# Altium PCB REO_ECG.PcbDoc (part 2 of 2)
Units mm, origin at the board's own origin, x right, y up, seen from the top; angles counter-clockwise.
Board outline 105 x 125 mm, 2 copper layers (Top Layer, Bottom Layer); 206 components, 124 nets, 654 pads, 46 vias.
Unrouted connection lines stored in the file: 133.
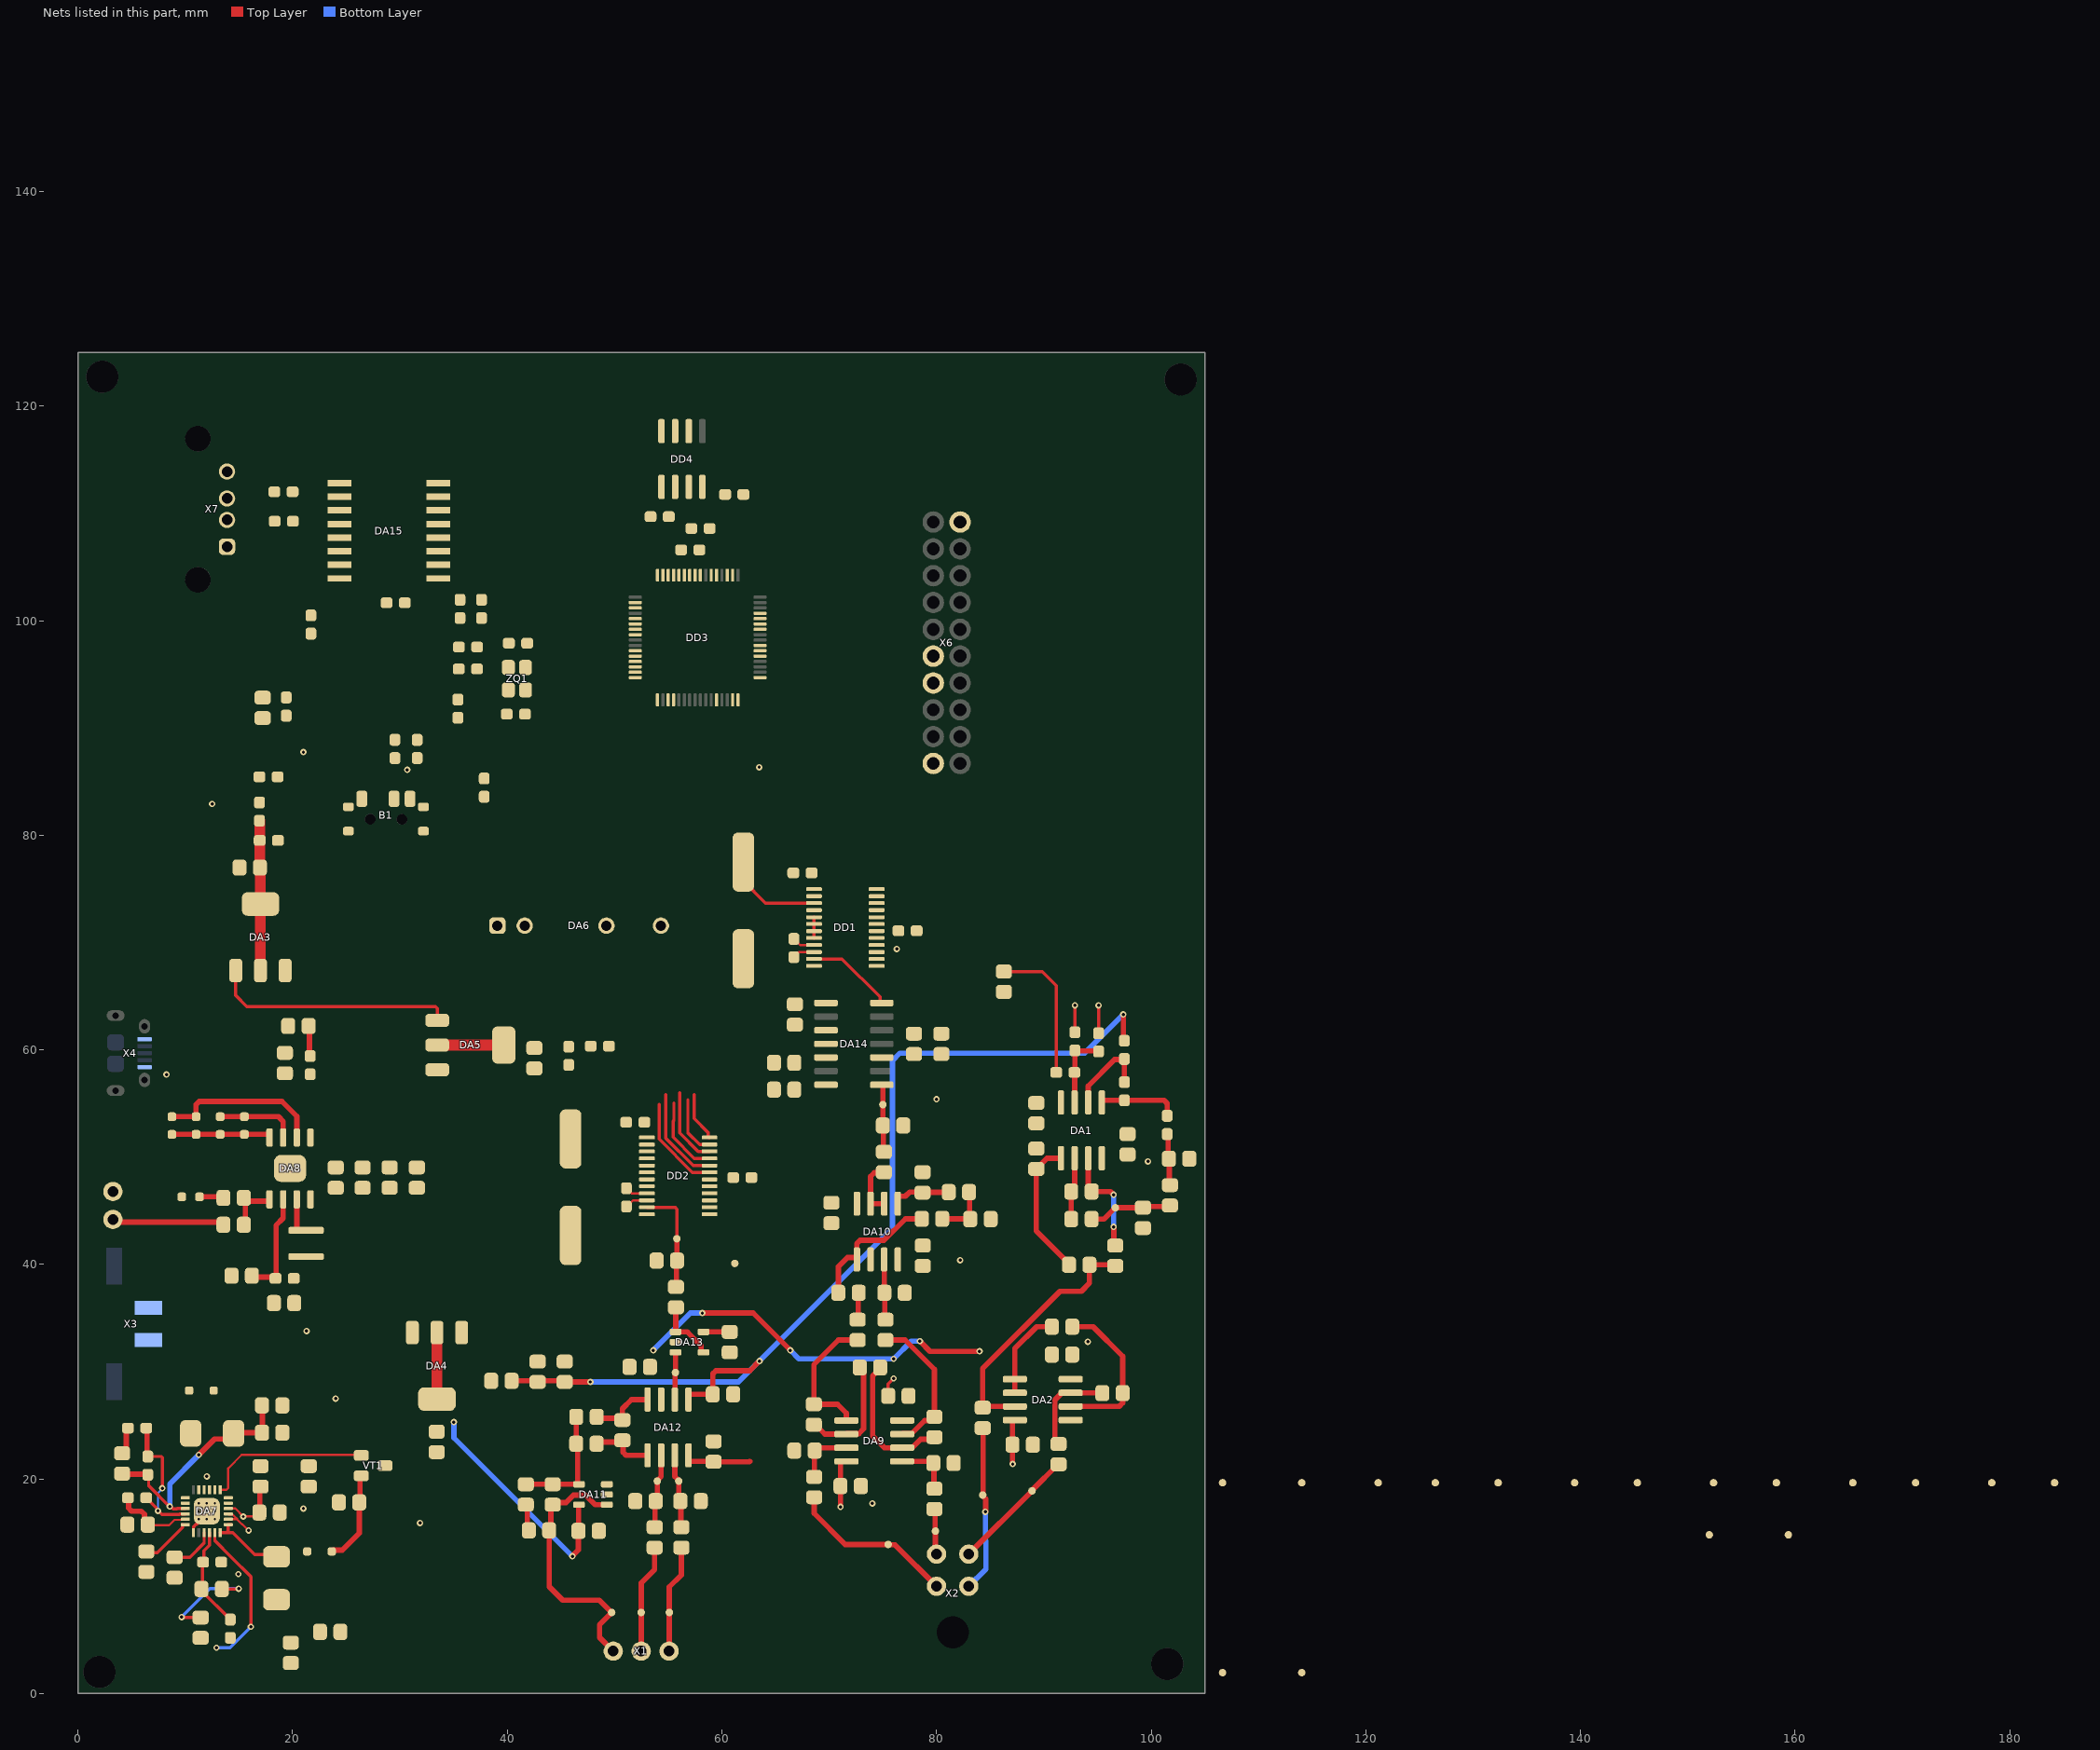
[diagram p2: the nets of this part, all layers, seen from the top]

## Part data
B1: library part "Slide switch SPDT", Code=-, Name=-
BQ1 BQ2: library part "SMD 4.9152MHz 2pin 10.3x4.5 16pF_1", Code=6321974907, Name="Резонатор кварцевый HC49SM 7.3728 MHz", Parameter 1="7.3728 MHz"
C17 C18 C22: library part "22u 35V 0805 ±20%", Code=6279375691, Name="Конденсатор X5R 35V 22uF±20% 0805"
C23: library part "6.8p 50V 0805 ±5%", Code=6219233221, Name="Конденсатор COG 16V 6.8pF±5% 0805"
C53 C54 C55 C56 C57 C63 C64 C65 C67 C69 C70 C71 C72 C73 C74: "CC0603KRX7R9BB104", Code=6279259871, Name="Конденсатор X7R 50V 0,1uF +-10% 0603"
DA1 DA2 DA9 DA10: library part AD8028_part
DA3 DA4 DA5: library part "LDO: 15-3.3V AMS1117", Code=6339112951, Name="Микросхема AMS-1117-3.3"
DA6: library part "DC-DC: 5-5V AM1D-0505SZ", Name="Микросхема AM1D-0505SZ, AIMTEC"
DA7: library part "DC-DC: 3-15/-15V TPS65130RGET", Code=6339113561, Name="Микросхема TPS65130RGET, TI"
DA14: library part LF398MX
DA15: library part "USB ADuM4160", Name="Микросхема ADuM4160"
DD3: library part "STM32F103 lqfp64 64kb", Code=6335530806, Name="Микросхема STM32F103RBT6"
DD4: library part "128Kb I2C 1MHz", Code=6339110311, Name="Микросхема M24M01-RMN6TP, ST"
L1 L2: "LPS5030", Code=6339119781, Name="Микросхема LPS5030-472MR(B), Coilcraft"
L3: "LPS3015", Code=6319247691, Name="Дроссель LPS3015-222MRC, Coilcraft"
L4 L5: library part "600Ohm 0,8A", Code=6310011671, Name="Дроссель BLM18HE601SN1D, Murata"
R18 R33: library part "100 ±1%  0805", Code=6094351171, Name="Резистор 100R±1%  0805"
R58 R59 R60: library part "1k ±1%", Code=6069174188, Name="Резистор 1k ±1% 0603"
VD1 VD5: library part "Rectifier 1A 40V", Code=6349982351, Name="Диод VS-10BQ040-M35BT, Vishay"
VD2 VD3 VD4 VD6: library part "LED green 0603", Code=6340003921, Name="Светодиод KPT-1608SGC, Kingbright"
VD7: library part "LED red 0603", Code=6349551609, Name="Светодиод KP-1608SURCK"
VT1: library part "MOS N Si2302CDS-T1-E3", Code=6349982201, Name="Транзистор Si2302CDS-T1-E3,  Vishay"
X1: library part "3 pin WF-3", Code=6313932013, Name="Вилка WF-3"
X2: library part "4 pin MicroFit DR R Molex"
X3: library part "2 pin MicroFit SR Molex", Code=6319211711, Name="Вилка Micro-Fit 3.0 43650-0225, Molex"
X4: library part "5 pin USB Micro SMD", Code=6319209171, Name="Розетка 10118194-0001LF, Amphenol"
X5: library part "2 pin WF-2", Code=6313952902, Name="Вилка WF-2"
X6: library part "20 pin IDC BH20 2.54", Code=6313922720, Name="Вилка BH-20 Импорт"
X7: library part "4 pin USB"
ZQ1: library part "SMD 8MHz 4pin 3.2x2.5 22pF", Code=6329545441, Name="Резонатор кварцевый KT-7X 8.0 MHz"
C1 C2 C3 C4 C5 C9 C10 C11 C12 C15 C33 C34 C35 C36 C39 C43 C44 C45 C46 C47 C51 C52: Code=6279254871, Name="Конденсатор X7R 50V 0,1uF ±10% 0805"
C6 C31 C32 C37 C38 C42: Code=6279352311, Name="Конденсатор NPO 50V 6800pF ±5% 0805"
C7 C8 C24 C25 C26 C27 C28 C29 C30: Code=6279375691, Name="Конденсатор X5R 35V 22uF±20% 0805"
C13 C14 C68: Code=6270000501, Name="Конденсатор X7R 25V 4,7uF±10% 0805"
C16 C19 C49 C50: Code=6289735441, Name="Конденсатор 12065D106KAT2A, AVX"
C20: Code=6279238291, Name="Конденсатор NP0 50V 12pF±5% 0603"
C21 C40 C41: Name="Конденсатор 0805B224K500NT, Fenghua"
C48: Code=6279261451, Name="Конденсатор X7R 50V  0,01uF±5%  0805"
C58 C59: Code=6270003321, Name="Конденсатор СС0603KRX7R0BB104, Yageo"
C60: Code=62193105441, Name="Конденсатор 0603-NPO-25В-1000"
C61 C62: Code=6219310401, Name="Конденсатор 0603CG220J500NT, Fenghua"
C66: Code=6270001221, Name="Конденсатор X7R 50V 0,22uF±10% 0603"
DA11: Name="Микросхема OPA189IDBVR"
DA13: Code=6339115821, Name="Микросхема TLV9101IDBVR"
R1 R26 R27: Code=6094342239, Name="Резистор 0R ±1% 0805"
R2 R3: Code=6069180761, Name="Резистор 680R ±1% 0603"
R4 R5 R56: Code=6069174188, Name="Резистор 1k ±1% 0603"
R6: Code=6094357331, Name="Резистор 3К ±1% 0603"
R7: Code=6069180621, Name="Резистор 200R±1% 0603"
R8 R12 R15 R16 R17 R34: Code=6027158691, Name="Резистор RC0805FR-071KL, Yageo"
R9 R10 R11 R13 R14: Code=6094352561, Name="Резистор 2k±1%  0805"
R19: Code=6069180891, Name="Резистор 2,2k ±1% 0603"
R20: Code=6060001691, Name="Резистор 121K±1% 0603"
R21 R23: Code=6069194591, Name="Резистор 1,2M±1% ТК50 0603"
R22 R29 R45: Code=6020003061, Name="Резистор RC0805JR-0710KL"
R24: Code=6027155891, Name="Резистор CRCW0603133KFKEA, Vishay"
R25 R49: Code=6094354057, Name="Резистор 51K±1% 0805"
R28: Code=6094357581, Name="20R ±1% 0805"
R30: Name="Резистор 0.5 ±1% 0603"
R31 R32 R41 R42 R43: Code=6094357331, Name="Резистор 3К ±1% 0805"
R35: Code=6019041741, Name="Резистор RC0805FR-07820KL, Yageo"
R36 R37 R38 R39: Code=6069137191, Name="Резистор 510R±1%  0805"
R40: Code=6094357025, Name="Резистор 300R±1%  0805"
R44: Name="Резистор RC0805FR-071KL, Yageo"
R46 R47: Code=6094357031, Name="Резистор 510K±1% 0805"
R48 R50: Code=6094357581, Name="Резистор 20K±1% 0805"
R51: Name="Резистор 75К±1% 0805"
R54 R55: Code=6069180381, Name="Резистор 27R±1% 0603"
R57: Code=6069191961, Name="Резистор 10K+-1% TK50 0603"

## Free pads (board coordinates)
  round 3 hole 3: ""(2,2) ""(2.25,122.75) ""(101.5,2.75) ""(102.75,122.5)

## Via types
v1: diameter 0.6, hole 0.3, Top Layer to Bottom Layer, 46 vias

## Nets (pads, with @x,y where several pads share a name; then routed paths per layer and width w, separated by ;. In a path a pad name is that pad's centre, name@x,y a point inside that pad or via, vN(x,y) a via of type N, cw(c..) or ccw(c..) an arc to the next point about the centre after c; other vN are vias at no path point)
1D_N: DD3.44
1D_P: DD3.45
1GAIN0: DD2.19 DD3.25 | length 9.2
  Top Layer w0.3: 54.149,54.9 54.149,51.694 57.259,48.584 DD2.19@58.849,48.584
1GAIN1: DD2.20 DD3.24 | length 9.2
  Top Layer w0.3: 54.784,55.809 54.784,51.766 57.331,49.219 DD2.20@58.849,49.219
2D_N: DA15.6
2D_P: DA15.7
3D_N: DA15.11 R54.1
3D_P: DA15.10 R55.1
4D_N: R54.2 X7.2
4D_P: R55.2 X7.3
+1.65: C9.1 C44.2 DA12.5 R4.1 R16.1 R17.2 TP22.1 | length 92.3
  Top Layer w0.5: R16.1@40.4,29.15 C9.1@45.35,29.15 ; C9.1@45.35,29.05 v1(47.75,29.05) ; DA12.5@56.883,27.409 56.883,27.85 56.933,27.9 C44.2@59.15,27.9 59.15,29.807 59.443,30.1 62.6,30.1 v1(63.5,31) ; v1(97.4,63.3) 97.419,63.281 97.419,60.931 R4.1@97.5,60.85
  Bottom Layer w0.5: v1(47.75,29.05) 61.55,29.05 v1(63.5,31) 75.9,43.4 75.9,59 76.6,59.7 93.8,59.7 v1(97.4,63.3)
+3.3: C11.1 C39.1 C46.1 C58.2 C59.1 C60.2 DA4.2 DA4.4 DA11.5 DA13.5 DD3.1 DD3.13 R16.2 TP14.1 | length 31.1
  Top Layer w0.1: C58.2@35.6,100.2 C58.2@35.6,100.25
  Top Layer w0.3: C59.1@35.18,92.87 C59.1@35.4,92.65
  Top Layer w0.5: v1(46.067,12.797) 46.067,12.824 46.628,13.385 C39.1@46.628,15.164 46.653,15.189 46.653,17.584 DA11.5@46.678,17.609 ; DA13.5@58.278,33.709 C46.1@60.728,33.709
  Top Layer w1: DA4.4@33.45,27.45 DA4.2@33.45,33.65
  Bottom Layer w0.5: v1@35.044,25.254 35.025,25.254 35.025,23.839 v1(46.067,12.797)
  other v1: 35.025,25.3
+3.3ADC: C12.1 C64.2 DA5.2 DA5.4 L4.1 TP19.1 | length 6.2
  Top Layer w1: DA5.2@33.475,60.45 DA5.4@39.675,60.45
+3.3M: C10.1 C69.2 DA3.2 DA3.4 L5.1 TP16.1 X6.1 | length 14.1
  Top Layer w1: C69.2@16.925,79.525 L5.1@16.925,81.341 ; C10.1@16.95,77 C69.2@16.95,79.25 ; DA3.4@16.975,73.125 C10.1@16.975,77 ; DA3.2@17,67.4 DA3.4@17,73.6
+3.3MCU: B1.3 C66.1 C67.1 C68.1 C70.2 C71.2 C72.2 C73.2 C74.2 DD3.19 DD3.32 DD3.48 DD3.64 DD4.8 L5.2 R58.2 R59.2 R60.2 TP31.1 | length 0.2
  Top Layer w0.3: C72.2@31.45,89.05 C72.2@31.6,88.9
+3ADC: C63.1 C65.2 DD1.1 DD2.1 L4.2 TP30.1
+5: C13.1 C27.1 C28.1 C29.1 C30.1 DA3.3 DA4.3 DA5.3 DA6.1 DA7.5 DA7.6 DA8.8 R18.1 TP7.1 VT1.3
"+5 USB": DA15.1 DD3.43
+5ADC: C55.1 C56.1 DA6.7 DD1.16 DD1.18 DD2.16 DD2.18 TP9.1 | length 0.3
  Top Layer w0.2: DD1.18@74.421,71.07 DD1.18@74.436,71.085 ; v1@76.2,69.4 v1(76.3,69.4) v1@76.3,69.508 ; C55.1@76.435,71.085 C55.1@76.45,71.1
+5C: C19.1 DA8.1 R19.2 TP8.1 X4.1
  other v1: 8.25,57.7
+12: C1.2 C2.2 C33.2 C35.2 C45.1 C50.1 C52.1 DA1.8 DA2.8 DA9.8 DA10.8 DA12.7 DA14.12 R27.2 TP12.1 | length 34.7
  Top Layer w0.5: v1(58.175,35.475) 62.899,35.475 v1(66.379,31.995) ; v1(78.45,32.85) 79.4,31.9 v1(84,31.9)
  Bottom Layer w0.5: v1(53.6,32) 57.075,35.475 v1(58.175,35.475) ; v1(66.379,31.995) 67.174,31.2 v1(76,31.2) ; v1@76.019,31.219 77.65,32.85 v1(78.45,32.85)
  other v1: 94.1,32.8 99.7,49.6
+P: C26.1 L3.2 R30.2 X3.1
  other v1: 21.3,33.8
-12: C3.2 C4.2 C34.1 C36.1 C43.1 C49.1 C51.1 DA1.4 DA2.4 DA9.4 DA10.4 DA12.4 DA14.3 R26.2 TP10.1 | length 15.3
  Top Layer w0.5: DA12.4@56.883,22.209 56.883,21.7 56.933,21.65 59.186,21.65 C43.1@59.228,21.609 62.531,21.609 62.573,21.65 62.6,21.65 ; v1(71.05,17.4) 71.05,21.595 71.1,21.645 DA9.4@71.6,21.645 ; v1(87.1,21.4) 87.088,21.412 87.088,23.188 C4.2@87.077,23.2 87.077,25.445 87.127,25.495 DA2.4@87.3,25.495
  other v1: 24,27.5 82.2,40.4 80,55.4
DRDY: DD1.24 DD3.22
DRDY1: DD2.24 DD3.35 | length 4.7
  Top Layer w0.3: 57.4,55.825 57.4,53.6 58.713,52.287 58.713,51.863 58.741,51.835 DD2.24@58.849,51.835
GAIN0: DD1.19 DD3.51
GAIN1: DD1.20 DD3.52
GND: BQ1.1 BQ2.1 C10.2 C12.2 C63.2 C64.1 C65.1 C66.2 C67.2 C68.2 C69.1 C70.1 C71.1 C72.1 C73.1 C74.1 DA3.1 DA5.1 DA15.2 DA15.3 DA15.4 DA15.5 DA15.8 DA15.9 DA15.12 DA15.13 DA15.14 DA15.15 DD1.2 DD1.4 DD2.2 DD2.4 DD2.5 DD2.6 DD2.7 DD2.8 DD3.18 DD3.31 DD3.47 DD3.63 DD4.2 DD4.3 DD4.4 R1.2 R5.1 R57.2 TP2.1 X6.20 X7.4 | length 36.4
  Top Layer w0.3: DA3.1@14.7,67.4 14.7,65.075 15.725,64.05 33.299,64.05 33.475,63.874 DA5.1@33.475,62.75 ; C71.1@19.4,91.15 C71.1@19.5,91.05 ; R1.2@86.278,67.306 89.844,67.306 91.15,66 R5.1@91.15,57.9
  Top Layer w0.5: R57.2@29.483,87.156 R57.2@29.527,87.2
  other v1: 12.5,82.925 30.675,86.1 63.475,86.35 21,87.75
GNDA: C1.1 C2.1 C3.1 C4.1 C6.2 C9.2 C11.2 C13.2 C14.2 C15.2 C16.2 C17.2 C18.2 C19.2 C21.2 C22.2 C24.2 C25.2 C26.2 C27.2 C28.2 C29.2 C30.2 C33.1 C34.2 C35.1 C36.2 C37.2 C39.2 C43.2 C44.1 C45.2 C46.2 C47.2 C48.2 C49.2 C50.2 C51.2 C52.2 C55.2 C56.2 C57.1 C58.1 C59.2 C60.1 C61.2 C62.2 DA2.5 DA4.1 DA6.2 DA6.5 DA7.0 DA7.2 DA7.3 DA7.19 DA8.0 DA11.2 DA11.3 DA13.2 DA14.10 DD1.12 DD1.13 DD1.14 DD1.15 DD1.17 DD2.12 DD2.13 DD2.14 DD2.15 DD2.17 DD3.12 L2.2 R1.1 R8.1 R10.2 R17.1 R24.1 R31.2 R32.2 R38.1 R41.2 R43.1 R46.1 R47.1 TP1.1 VD7.1 X3.2 X4.5 X5.1 ZQ1.2 ZQ1.4 | length 6.7
  Top Layer w0.2: DA7.2@14,16.25 14.801,16.25 ; DA7.3@14,16.75 14.05,16.7 14.401,16.7 14.8,16.301 14.8,16.251 15.26,15.791 15.309,15.791 v1@15.898,15.202
  Top Layer w0.3: DA7.19@10.75,15 10.75,15.526 10.999,15.775 11.054,15.775 11.231,15.952 11.231,16.231 DA7.0@11.25,16.25 ; C33.1@75.491,27.744 75.491,28.866 v1(76,29.375)
  other v1: 14.94,11.14 15.9,15.2 31.875,15.9 21,17.25 74.025,17.725
INGEN: C31.2 TP11.1 X2.3 | length 4.1
  Top Layer w0.5: C31.2@79.8,17.2 79.862,17.138 TP11.1@79.862,15.188 ; X2.3@79.9,13.1 TP11.1@79.9,15.15
LOGIC: DA14.11 DD3.11
"MEM SCL": DD3.29 DD4.6 R59.1
"MEM SDA": DD3.30 DD4.5 R60.1
"MEM WP": DD3.28 DD4.7 R58.1
NetB1_1: B1.1 R57.1 | length 0.1
  Top Layer w0.3: R57.1@29.45,88.977 R57.1@29.527,88.9
NetB1_2: B1.2 DD3.60 | length 0.1
  Top Layer w0.5: B1.2@29.439,83.399 B1.2@29.483,83.443
NetBQ1_2: BQ1.2 DD2.3
NetBQ2_2: BQ2.2 DD1.3 | length 9.2
  Top Layer w0.3: BQ2.2@62,77.5 62,75.75 64.064,73.686 DD1.3@68.579,73.686
NetC5_1: C5.1 R8.2 R9.2 TP25.1 | length 7.8
  Top Layer w0.5: R9.2@94.45,44.228 95.608,44.228 TP25.1@96.661,45.281 ; TP25.1@96.661,45.299 R8.2@99.233,45.299 99.331,45.398 101.652,45.398 C5.1@101.75,45.496
NetC5_2: C5.2 C6.1 R7.2 TP24.1 | length 4.9
  Top Layer w0.5: R7.2@101.5,52.15 101.575,52.075 101.575,49.925 C6.1@101.65,49.85 101.7,49.8 101.7,47.446 C5.2@101.75,47.396
NetC7_1: C7.1 TP15.1 X2.4 | length 11.9
  Top Layer w0.5: X2.4@83,13 TP15.1@88.9,18.9 88.9,18.952 91.314,21.366 C7.1@91.373,21.366 ; C7.1@91.54,21.375 C7.1@91.565,21.4
NetC7_2: C7.2 DA2.7 R14.2 | length 8.7
  Top Layer w0.5: C7.2@91.035,23.313 91.035,25.128 91.025,25.138 91.025,27.385 91.675,28.035 DA2.7@92.5,28.035 R14.2@95.385,28.035
NetC8_1: C8.1 TP17.1 X2.2 | length 15.6
  Top Layer w0.5: C8.1@84.3,24.75 84.339,24.711 TP17.1@84.339,18.68 ; TP17.1@84.338,18.68 84.338,18.538 TP17.1@84.3,18.5 84.3,18.446 84.589,18.157 84.589,17.016 84.55,16.977 v1(84.55,16.95)
  Bottom Layer w0.5: X2.2@83,10 84.6,11.6 84.6,14.236 84.55,14.286 v1(84.55,16.95)
NetC8_2: C8.2 DA2.3 R12.1 R15.2 | length 23.8
  Top Layer w0.5: C8.2@84.3,26.65 84.3,30.3 91.5,37.5 93.5,37.5 94.25,38.25 R12.1@94.25,39.964 96.561,39.964 R15.2@96.661,39.864 ; C8.2@84.515,26.765 DA2.3@87.3,26.765
NetC14_1: C14.1 L1.1 VT1.2 | length 8.6
  Top Layer w0.5: L1.1@23.643,13.25 23.774,13.381 24.631,13.381 26.207,14.957 C14.1@26.207,17.822 ; C14.1@26.282,17.897 26.282,20.214 VT1.2@26.357,20.289
NetC15_1: C15.1 DA7.4 DA7.8 DA7.9 DA7.10 DA7.11 R18.2 | length 5.9
  Top Layer w0.2: DA7.4@14,17.25 14.65,17.25 v1(15.4,16.5) 15.427,16.527 16.367,16.527 16.529,16.689 C15.1@16.529,17.25
  Top Layer w0.5: C15.1@16.95,16.929 16.95,19.25 R18.2@17,19.3
  other v1: 12,20.25
NetC16_1: C16.1 R19.1 | length 2.9
  Top Layer w0.5: C16.1@21.484,62.221 21.559,62.146 21.559,59.496 R19.1@21.634,59.421
NetC17_1: C17.1 DA7.21 | length 4.3
  Top Layer w0.3: C17.1@9,12.7 10.418,12.7 11.75,14.032 DA7.21@11.75,15
NetC18_1: C18.1 DA7.18 | length 4.6
  Top Layer w0.3: C18.1@6.369,13.246 6.472,13.144 7.394,13.144 9.725,15.475 DA7.18@9.725,15.75
NetC20_1: C20.1 DA7.16 R20.1 R21.2 | length 13.6
  Top Layer w0.3: R20.1@6.35,18.25 7.393,17.207 7.393,17.082 v1(7.45,17.025) 7.481,17.025 7.806,16.7 9.424,16.7 9.474,16.75 9.681,16.75 DA7.16@10,16.75 ; R21.2@6.5,22.1 7.732,22.1 7.849,21.983 v1(7.849,19.145)
  Top Layer w0.5: C20.1@6.35,24.75 6.425,24.675 6.425,22.175 R21.2@6.5,22.1
  Bottom Layer w0.2: v1(7.45,17.025) 7.45,18.695 7.849,19.094 v1(7.849,19.145)
NetC20_2: C20.2 R22.1 | length 2.1
  Top Layer w0.5: R22.1@4.5,22.727 4.5,24.6 C20.2@4.65,24.75
NetC21_1: C21.1 DA7.17 R20.2 | length 7.5
  Top Layer w0.2: C21.1@6.5,15.75 6.55,15.7 8.5,15.7 9,16.2 9.95,16.2 DA7.17@10,16.25
  Top Layer w0.5: R20.2@4.65,18.2 4.65,18.057 4.707,18 4.707,17.293 5,17 5.894,17 6.187,16.707 6.187,16.013 C21.1@6.45,15.75
NetC22_1: C22.1 DA7.15 R21.1 R22.2 R26.1 VD5.2 | length 22.9
  Top Layer w0.2: R21.1@6.5,20.4 R21.1@6.583,20.317
  Top Layer w0.3: R21.1@6.583,20.317 6.583,19.374 v1@8.507,17.45 ; v1(8.55,17.45) 8.626,17.45 8.876,17.2 9.217,17.2 9.267,17.25 DA7.15@10,17.25
  Top Layer w0.5: R22.2@4.114,20.5 4.164,20.45 6.45,20.45 R21.1@6.5,20.4 ; v1(11.25,22.25) 12.723,23.723 13.973,23.723 VD5.2@14.5,24.25 ; VD5.2@14.561,24.311 C22.1@17.14,24.311 17.19,24.361 R26.1@17.19,26.792
  Bottom Layer w0.5: v1(8.55,17.45) 8.55,19.55 v1(11.25,22.25)
NetC23_1: C23.1 C24.1 DA7.23 R23.2 R27.1 VD1.1 | length 14.3
  Top Layer w0.3: C23.1@11.425,5.19 C23.1@11.525,5.19 ; DA7.23@12.75,15 12.75,14.249 14.25,12.749 16.1,10.899 v1(16.1,6.225)
  Top Layer w0.5: R27.1@22.525,5.725 R27.1@22.55,5.75
  Bottom Layer w0.3: v1(12.9,4.275) 14.15,4.275 v1(16.1,6.225)
NetC23_2: C23.2 R25.2 | length 9.8
  Top Layer w0.3: v1(9.65,7.125) 9.668,7.107 11.407,7.107 C23.2@11.425,7.09 ; R25.2@13.4,9.75 13.412,9.763 14.962,9.763 v1(14.975,9.775)
  Bottom Layer w0.3: v1(9.65,7.125) 12.3,9.775 v1(14.975,9.775)
NetC25_1: C25.1 DA8.6 R30.1 | length 9.9
  Top Layer w0.5: C25.1@16.2,38.95 16.325,38.825 18.275,38.825 R30.1@18.4,38.7 ; R30.1@18.45,38.7 18.45,43.65 19.115,44.315 DA8.6@19.115,46.07
NetC31_1: C31.1 DA9.5 R31.1 | length 5
  Top Layer w0.5: DA9.5@76.8,21.645 R31.1@79.545,21.645 ; C31.1@79.75,19.15 R31.1@79.75,21.44
NetC32_1: C32.1 DA9.3 R32.1 | length 5.1
  Top Layer w0.5: C32.1@68.625,20.225 R32.1@68.625,22.625 ; R32.1@68.915,22.915 DA9.3@71.6,22.915
NetC32_2: C32.2 TP13.1 X2.1 | length 15.7
  Top Layer w0.5: C32.2@68.6,18.3 68.6,16.793 71.493,13.9 TP13.1@75.5,13.9 75.538,13.862 76.138,13.862 X2.1@80,10
NetC37_1: C37.1 C38.2 R40.2 | length 5.2
  Top Layer w0.5: R40.2@80.524,44.255 80.538,44.242 C37.1@83.126,44.242 ; C38.2@83.034,46.746 83.087,46.693 83.087,44.28 C37.1@83.126,44.242 ; C37.1@83.139,44.228 C37.1@83.126,44.242
NetC38_1: C38.1 DA10.5 R41.1 | length 5.6
  Top Layer w0.5: DA10.5@76.39,45.664 76.39,46.305 76.44,46.355 77.097,46.355 77.493,46.75 78.65,46.75 R41.1@78.7,46.7 78.723,46.723 81.111,46.723 C38.1@81.134,46.746
NetC40_1: C40.1 DA12.2 R46.2 TP26.1 | length 7
  Top Layer w0.5: C40.1@53.728,15.509 53.778,15.559 53.778,17.893 53.978,18.093 TP26.1@53.978,19.809 53.978,19.863 54.343,20.228 DA12.2@54.343,22.209
NetC40_2: C40.2 TP20.1 X1.2 | length 10.2
  Top Layer w0.5: X1.2@52.478,3.959 TP20.1@52.478,7.559 52.478,10.309 53.728,11.559 C40.2@53.728,13.609
NetC41_1: C41.1 DA12.3 R47.2 TP27.1 | length 7
  Top Layer w0.5: DA12.3@55.613,22.209 55.613,20.228 55.978,19.863 TP27.1@55.978,19.809 55.978,18.093 56.178,17.893 56.178,15.559 C41.1@56.228,15.509
NetC41_2: C41.2 TP21.1 X1.1 | length 10.1
  Top Layer w0.5: X1.1@55.078,3.959 55.089,3.97 55.089,7.547 TP21.1@55.101,7.559 55.101,9.932 56.228,11.059 C41.2@56.228,13.609
NetC42_1: C42.1 R45.1 | length 2.5
  Top Layer w0.5: R45.1@41.728,17.609 41.867,17.469 41.867,15.35 C42.1@42.006,15.211
NetC42_2: C42.2 DA11.1 R44.1 TP18.1 X1.3 | length 25
  Top Layer w0.5: DA11.1@49.278,17.609 48.178,17.609 47.286,18.5 46.169,18.5 45.478,17.809 44.428,17.809 R44.1@44.228,17.609 44.067,17.448 44.067,15.372 C42.2@43.906,15.211 43.906,9.969 45.162,8.713 48.573,8.713 TP18.1@49.728,7.559 48.6,6.431 48.6,5.236 X1.3@49.878,3.959
NetC47_1: C47.1 DD2.11 R51.2 TP5.1 TP29.1 | length 10.2
  Top Layer w0.3: DD2.11@53.007,45.332 55.626,45.332 55.802,45.157 TP29.1@55.802,42.401 TP29.1@55.808,42.395
  Top Layer w0.5: R51.2@55.715,37.904 55.765,37.954 55.765,40.307 C47.1@55.815,40.357 55.808,40.363 TP29.1@55.808,42.395
NetC48_1: C48.1 DA14.8
NetC53_1: C53.1 DD1.9 | length 2.1
  Top Layer w0.2: C53.1@66.7,70.35 66.731,70.35 67.307,69.774 DD1.9@68.579,69.774
NetC53_2: C53.2 DD1.10 | length 2.1
  Top Layer w0.2: C53.2@66.7,68.65 66.731,68.65 67.195,69.114 DD1.10@68.579,69.114
NetC54_1: C54.1 DD2.9 | length 2.1
  Top Layer w0.2: C54.1@51.1,47.1 51.131,47.1 51.603,46.628 DD2.9@53.007,46.628
NetC54_2: C54.2 DD2.10 | length 2.1
  Top Layer w0.2: C54.2@51.1,45.4 51.131,45.4 51.699,45.967 DD2.10@53.007,45.967
NetC57_2: C57.2 DD3.7
NetC61_1: C61.1 R56.2 ZQ1.1 | length 0.2
  Top Layer w0.5: ZQ1.1@40.1,95.65 ZQ1.1@40.154,95.704 ; C61.1@40.154,97.996 C61.1@40.208,98.05
NetC62_1: C62.1 DD3.5 ZQ1.3 | length 0.1
  Top Layer w0.5: ZQ1.3@41.7,93.55 ZQ1.3@41.754,93.496
NetDA1_1: DA1.1 R6.2 R7.1 TP23.1 | length 7.5
  Top Layer w0.5: DA1.1@95.405,55.1 95.405,55.246 95.455,55.296 R6.2@97.506,55.296 101.207,55.296 101.5,55.003 R7.1@101.5,53.85
NetDA1_2: DA1.2 R4.2 R6.1 | length 8.1
  Top Layer w0.5: DA1.2@94.135,55.1 94.135,56.635 96.593,59.093 97.443,59.093 R4.2@97.5,59.15 97.503,59.147 97.503,56.999 R6.1@97.506,56.996
NetDA1_3: DA1.3 R2.2 R3.2 R5.2 | length 7
  Top Layer w0.5: R3.2@92.7,59.9 94.85,59.9 R2.2@94.9,59.85 ; DA1.3@92.865,55.1 R5.2@92.865,57.885 ; R5.2@92.9,57.95 R3.2@92.9,59.95
NetDA1_5: DA1.5 R10.1 R12.2 | length 12.2
  Top Layer w0.5: R10.1@89.3,48.9 89.3,43.114 92.35,40.064 R12.2@92.35,39.964 ; R10.1@89.8,49.4 90.3,49.9 DA1.5@91.595,49.9
NetDA1_6: DA1.6 R9.1 R11.2 | length 5.4
  Top Layer w0.5: R9.1@92.55,44.228 R11.2@92.55,46.8 ; DA1.6@92.865,49.9 92.87,49.895 R11.2@92.87,47.12
NetDA1_7: DA1.7 R11.1 R15.1 | length 9.6
  Top Layer w0.5: R11.1@94.135,47.115 DA1.7@94.135,49.9 ; R11.1@94.45,46.8 96.2,46.8 v1(96.5,46.5) ; v1(96.5,43.5) 96.519,43.481 R15.1@96.519,41.906
  Bottom Layer w0.5: v1(96.5,43.5) v1(96.5,46.5)
NetDA2_1: DA2.1 DA2.2 R13.1 | length 8.4
  Top Layer w0.5: DA2.2@87.3,28.035 DA2.1@87.3,29.305 87.3,32.166 89.334,34.2 R13.1@90.75,34.2
NetDA2_6: DA2.6 R13.2 R14.1 | length 15.2
  Top Layer w0.5: DA2.6@92.5,26.765 97.022,26.765 97.35,27.093 97.35,28.1 97.35,31.45 94.6,34.2 R13.2@92.65,34.2
NetDA7_1: DA7.1 DA7.24 L1.2 VD1.2 | length 7.3
  Top Layer w0.3: DA7.24@13.25,15 13.835,15 ; DA7.1@14.275,15.75 DA7.1@14,15.75 14,15.165 13.835,15 ; VD1.2@18.5,12.75 18.295,12.955 16.464,12.955 14.419,15 13.835,15
NetDA7_7: DA7.7 VT1.1 | length 15.6
  Top Layer w0.2: DA7.7@13.25,19 13.827,19 14,19.173 14,21 15.25,22.25 VT1.1@26.4,22.25
NetDA7_13: DA7.13 DA7.14 L2.1 VD5.1
NetDA7_22: DA7.22 R23.1 R24.2 R25.1 | length 9.5
  Top Layer w0.2: R25.1@11.525,9.725 R25.1@11.5,9.75 R25.1@11.588,9.838 ; R24.2@11.588,12.187 R24.2@11.65,12.25 R24.2@11.735,12.335
  Top Layer w0.3: R25.1@11.525,9.725 11.525,9.561 R23.1@14.187,6.9 ; R25.1@11.588,9.838 R24.2@11.588,12.187 ; R24.2@11.735,12.335 11.735,13.31 12.25,13.825 DA7.22@12.25,15
NetDA8_2: DA8.2 VD2.2 VD3.1 | length 15.4
  Top Layer w0.5: VD2.2@8.75,53.775 VD3.1@11,53.775 11,54.907 11.293,55.2 19,55.2 20.385,53.815 DA8.2@20.385,51.83
NetDA8_3: DA8.3 VD4.2 VD6.1 | length 7.6
  Top Layer w0.5: VD4.2@13.25,53.775 VD6.1@15.5,53.775 18.675,53.775 19.115,53.335 DA8.3@19.115,51.83
NetDA8_4: DA8.4 VD2.1 VD3.2 VD4.1 VD6.2 | length 9.4
  Top Layer w0.5: VD2.1@8.75,52.125 VD3.2@11,52.125 VD4.1@13.25,52.125 VD6.2@15.5,52.125 17.795,52.125 17.845,52.075 DA8.4@17.845,51.83
NetDA8_5: DA8.5 R28.1 R29.1 | length 4.9
  Top Layer w0.5: R29.1@15.589,43.354 15.589,45.904 17.795,45.904 17.845,45.954 DA8.5@17.845,46.07
NetDA8_7: DA8.7 L3.1 | length 3.7
  Top Layer w0.5: DA8.7@20.385,46.07 20.385,43.245 20.45,43.18 L3.1@21.25,43.18
NetDA9_1: DA9.1 R34.1 R37.1 | length 12.8
  Top Layer w0.5: DA9.1@71.6,25.455 71.6,26.15 70.778,26.972 R34.1@68.567,26.972 68.567,30.667 70.85,32.95 R37.1@72.647,32.95
NetDA9_2: DA9.2 R33.2 R34.2 | length 10.9
  Top Layer w0.5: R34.2@68.708,25.072 69.595,24.185 DA9.2@71.6,24.185 71.65,24.235 72.757,24.235 73.2,24.678 73.2,30.05 R33.2@72.85,30.4
NetDA9_6: DA9.6 R33.1 R35.2 | length 12.3
  Top Layer w0.5: R33.1@74.75,30.4 74.75,30.307 74.05,29.607 74.05,24 75.135,22.915 DA9.6@76.8,22.915 ; DA9.6@77.797,22.997 78.515,23.715 79.615,23.715 R35.2@79.8,23.9
NetDA9_7: DA9.7 R35.1 R36.1 | length 13.8
  Top Layer w0.5: R36.1@75.238,32.95 77.075,32.95 79.8,30.225 R35.1@79.8,25.8 79.446,25.446 78.886,25.446 77.675,24.235 76.85,24.235 DA9.7@76.8,24.185
NetDA10_1: DA10.1 R39.2 R40.1 | length 13
  Top Layer w0.5: R39.2@70.847,37.358 70.847,39.797 71.7,40.65 DA10.1@72.53,40.65 ; DA10.1@72.58,40.464 72.58,41.957 72.873,42.25 75.1,42.25 77.105,44.255 R40.1@78.624,44.255
NetDA10_2: DA10.2 R37.2 R39.1 | length 2.5
  Top Layer w0.5: R37.2@72.647,34.85 72.697,34.9 72.697,37.308 R39.1@72.747,37.358
NetDA10_3: DA10.3 R36.2 R38.2 | length 5.7
  Top Layer w0.5: DA10.3@75.12,40.464 75.129,40.455 75.129,37.367 R38.2@75.138,37.358 75.188,37.308 75.188,34.9 R36.2@75.238,34.85
NetDA10_6: DA10.6 DA10.7 R42.1 | length 5.3
  Top Layer w0.5: DA10.6@75.11,45.674 DA10.6@75.12,45.664 DA10.7@73.85,45.664 73.85,48.207 74.193,48.55 75.05,48.55 R42.1@75.1,48.6 R42.1@75.11,48.59
NetDA11_4: DA11.4 R44.2 R45.2 R48.2 R50.1 | length 11.3
  Top Layer w0.5: R45.2@41.728,19.509 R44.2@44.228,19.509 DA11.4@46.601,19.509 ; R50.1@46.428,25.798 46.426,25.796 R48.2@46.425,23.286 R48.2@46.425,23.286 46.551,23.16 46.551,19.559 DA11.4@46.601,19.509 ; DA11.4@46.678,19.509 DA11.4@46.601,19.509
NetDA12_1: DA12.1 R48.1 R49.1 | length 6.1
  Top Layer w0.5: R48.1@48.325,23.286 48.486,23.447 50.566,23.447 R49.1@50.728,23.609 50.785,23.551 50.785,22.501 51.078,22.209 DA12.1@53.073,22.209
NetDA12_6: DA12.6 DA13.3 TP28.1 | length 4.6
  Top Layer w0.5: DA12.6@55.613,27.409 55.642,27.438 55.642,29.899 TP28.1@55.671,29.928 55.674,29.931 55.674,31.805 DA13.3@55.678,31.809 55.813,31.809 DA13.3@55.863,31.759
NetDA12_8: DA12.8 R49.2 R50.2 | length 6.3
  Top Layer w0.5: R50.2@48.328,25.798 48.472,25.653 50.583,25.653 R49.2@50.728,25.509 50.728,26.559 51.578,27.409 DA12.8@53.073,27.409
NetDA13_1: DA13.1 DA13.4 R51.1 | length 6
  Top Layer w0.5: R51.1@55.715,36.004 55.696,35.985 55.696,33.727 DA13.1@55.678,33.709 56.778,33.709 58.066,32.42 58.066,31.859 58.116,31.809 DA13.4@58.278,31.809
NetDA14_1: DA14.1 R42.2 R43.2 TP4.1 | length 6.4
  Top Layer w0.5: DA14.1@74.9,56.75 74.95,56.75 75,56.7 TP4.1@75,54.9 R43.2@75,52.95 75.05,52.9 75.05,50.55 R42.2@75.1,50.5
NetDA14_7: DA14.7 DD1.11 | length 8.3
  Top Layer w0.3: DD1.11@68.579,68.479 71.196,68.479 74.731,64.944 74.731,64.52 74.881,64.37 DA14.7@74.9,64.37
  Top Layer w0.5: DA14.7@75.15,64.37 DA14.7@75.2,64.42
NetDA15_16: DA15.16 X7.1
NetDD1_5: DD1.5 DD1.6 DD1.7 DD1.8 | length 1.9
  Top Layer w0.3: DD1.8@68.579,70.435 DD1.7@68.579,71.07 DD1.6@68.579,71.73 DD1.5@68.579,72.365
NetDD3_6: DD3.6 R56.1
NetDD3_26: DD3.26 R2.1 TP3.1 | length 2.6
  Top Layer w0.3: R2.1@95.1,61.55 v1(95.1,64.15)
NetDD3_27: DD3.27 R3.1 TP6.1 | length 2.5
  Top Layer w0.3: R3.1@92.9,61.65 v1(92.9,64.15)
NetR28_2: R28.2 VD7.2 | length 2.3
  Top Layer w0.5: VD7.2@11.319,46.311 13.439,46.311 R28.2@13.55,46.2
NetR29_2: R29.2 X5.2 | length 10.5
  Top Layer w0.5: X5.2@3.25,44.2 3.499,43.951 4.192,43.951 4.193,43.95 13.3,43.95 R29.2@13.55,43.7
"OFF ADJ": DA14.14 DD3.10 | length 0.8
  Top Layer w0.3: DA14.14@68.9,56.75 DA14.14@69.7,56.75
PDWN: DD1.22 DD3.40
PDWN1: DD2.22 DD3.37 | length 7.2
  Top Layer w0.3: 56.075,56 56.075,52.25 57.786,50.539 DD2.22@58.849,50.539
SCLK: DD1.23 DD3.21
SCLK1: DD2.23 DD3.34 | length 5.6
  Top Layer w0.3: 56.829,55.35 56.829,52.271 57.926,51.174 DD2.23@58.849,51.174
SPEED: DD1.21 DD3.39
SPEED1: DD2.21 DD3.38 | length 7.5
  Top Layer w0.3: 55.525,55.05 55.525,53.453 55.444,53.372 55.444,51.856 57.421,49.879 DD2.21@58.849,49.879
SWCLK: DD3.49 X6.9
SWIO: DD3.46 X6.7
pads on no net: B1.0 DA7.12 DA7.20 DA14.2 DA14.4 DA14.5 DA14.6 DA14.9 DA14.13 DD3.2 DD3.3 DD3.4 DD3.8 DD3.9 DD3.14 DD3.15 DD3.16 DD3.17 DD3.20 DD3.23 DD3.33 DD3.36 DD3.41 DD3.42 DD3.50 DD3.53 DD3.54 DD3.55 DD3.56 DD3.57 DD3.58 DD3.59 DD3.61 DD3.62 DD4.1 X2.0 X3.0 X4.0 X4.2 X4.3 X4.4 X6.2 X6.3 X6.4 X6.5 X6.6 X6.8 X6.10 X6.11 X6.12 X6.13 X6.14 X6.15 X6.16 X6.17 X6.18 X6.19 X7.

## Polygon pours and split planes (outlines as drawn)
GNDA on Top Layer "NONET_L-01_P-001" (solid, remove dead copper, pour order 87): 1,1 1,66 104,66 104,1
GND on Top Layer "Top Layer-GND" (solid, remove dead copper, shelved, pour order 89): 1.046,67 88.275,67 88.275,57.075 91.9,57.075 92,57.175 91.925,57.25 91.925,67 104.046,67 104.046,121 1.046,121
+5 on Top Layer "Top Layer-+5" (solid, remove dead copper, pour order 29): 15.75,20 28,20 32.5,20 32.5,36.25 35.5,36.25 35.5,44.5 35.5,59.2 35.25,59.2 35.25,59.25 31.75,59.25 31.8,59.3 31.8,66.675 40,66.675 40,75 35.825,74.987 35.825,69 18.3,69 18.3,64.5 28.25,64.5 28.25,54.75 32.5,54.75 32.5,47.75 23,47.75 23,47.5 21.4,47.5 21.4,44.5 28,44.5 28,22.25 13.5,22.25 13.5,17.4 15.75,17.4
+3.3 on Top Layer "NONET_L-01_P-001" (solid, remove dead copper, pour order 38): 38.7,31 38.7,27.3 35.9,27.3 35.8,27.2 35.8,24.2 31.2,24.2 31.2,35.5 34.4,35.5 34.4,31
GNDA on Top Layer "NONET_L-01_P-001" (solid, remove dead copper, pour order 49): 40,66 40,75 52,75 52,66
GNDA on Top Layer "NONET_L-01_P-001" (solid, remove dead copper, pour order 53): 67,66 67,72 79,72 79,66
+12 on Top Layer "NONET_L-01_P-001" (solid, pour order 84): 70.1,60.1 70.1,47.5 73.4,47.5 73.4,45.3 69,45.3 69,31.6 65.6,31.6 65.6,60.1
-12 on Top Layer "NONET_L-01_P-001" (solid, pour order 79): 75.7,41.2 83.2,41.2 83.2,38.6 75.7,38.6
-12 on Top Layer "NONET_L-01_P-001" (solid, pour order 78): 77,54 92.3,54 92.3,56.6 82.6,56.6 82.6,60.6 73.6,60.6 73.6,58.7 73.5,58.6 73.6,58.5 77,58.5
+12 on Top Layer "NONET_L-01_P-001" (solid, pour order 77): 95.2,51 100.3,51 100.3,47.4 99.1,47.4 99.1,48.4 95.2,48.4
+12 on Top Layer "NONET_L-01_P-001" (solid, pour order 76): 91.4,29.1 91.4,33.4 95,33.4 95,29.1
+12 on Top Layer "NONET_L-01_P-001" (solid, remove dead copper, pour order 69): 75.4,32.275 84.6,32.275 84.6,25.334 75.4,25.268
+12 on Top Layer "NONET_L-01_P-001" (solid, pour order 68): 52.4,32.8 55,32.8 55,26.8 52.3,26.8 52.4,26.9
+12 on Top Layer "NONET_L-01_P-001" (solid, pour order 42): 24.1,3.5 40.7,3.5 40.7,24.6 40.7,26.4 36.5,26.4 36.5,8 24.1,8
+P on Top Layer "NONET_L-01_P-001" (solid, pour order 67): 19.1,41.9 24.5,41.9 24.5,31.6 19.1,31.6
+5ADC on Top Layer "NONET_L-01_P-001" (solid, pour order 52): 74.421,68.81 74.421,72.21 76.75,72.21 76.75,68.81
+5ADC on Top Layer "Top Layer-+5ADC" (solid, pour order 64): 58.9,46.1 61.9,46.1 61.9,58.6 58.8,58.6 58.8,73.4 54,73.4 54,56.9 59.9,56.9 59.9,49 58.9,49
-12 on Top Layer "NONET_L-01_P-001" (solid, pour order 62): 18.5,25.5 18.5,29 26,29 26,25.5
NetC23_1 on Top Layer "Top Layer-NetC23_1" (solid, pour order 54): 23,3.75 23,7.25 21,7.25 21,9.25 16.5,9.25 16.5,5.75 10.5,5.75 10.5,3.75 17.5,3.75
NetDA7_13 on Top Layer "NONET_L-01_P-001" (solid, pour order 56): 9.75,17.443 9,17.443 9,29 10.75,29 10.75,21.25 10.497,21.25 10.477,17.443
NetC15_1 on Top Layer "NONET_L-01_P-001" (solid, pour order 57): 13,18.75 13,20.75 11,20.75 11,18.75
NetDA7_1 on Top Layer "NONET_L-01_P-001" (solid, remove dead copper, pour order 58): 13,13.75 13,15.25 13.5,15.75 22,15.75 22,10.75 17.5,10.75 14.5,13.75
GNDA on Top Layer "NONET_L-01_P-001" (solid, pour order 59): 25,16.25 18,16.25 18,19.75 23.5,19.75 23.5,19.25 25,19.25
+5C on Top Layer "NONET_L-01_P-001" (solid, pour order 60): 7.5,58.2 23,58.2 23,51.45 21,51.45 21,56.45 7.5,56.45
-12 on Bottom Layer "NONET_L-01_P-001" (solid, remove dead copper, pour order 33): 37.175,24.285 37.175,29 25.7,29 25.7,24.285 34.2,24.285 34.2,26 36,26 36,24.285
-12 on Bottom Layer "Bottom Layer--12" (solid, remove dead copper, pour order 40): 18.5,20.5 69.5,20.5 69.5,16.5 72.5,16.5 72.5,21 89.5,21 89.5,25.6 83.2,25.6 83.2,57.9 76.5,57.9 76.5,26.9 26,26.9 26,29 18.5,29
GND on Bottom Layer "NONET_L-01_P-001" (solid, remove dead copper, pour order 90): 20.5,89.725 20.5,89.775 24.15,89.775 24.15,75.125 20.5,78.775 20.5,89.7
GND on Bottom Layer "NONET_L-01_P-001" (solid, remove dead copper, pour order 81): 1,121 104,121 104,67 1,67
GNDA on Bottom Layer "NONET_L-01_P-001" (solid, remove dead copper, pour order 91): 1,66 104,66 104,1 1,1
+12 on Bottom Layer "Bottom Layer-+12" (solid, pour order 80): 83.4,30.4 95,30.4 95,34.6 100.3,34.6 100.3,51 92.9,51 92.9,34.6 83.4,34.6
+12 on Bottom Layer "NONET_L-01_P-001" (solid, remove dead copper, pour order 43): 37.5,24.5 37.5,31.625 77,31.625 77,24.5
+P on Bottom Layer "NONET_L-01_P-001" (solid, pour order 73): 24.5,31.6 4.6,31.6 4.6,34.4 24.5,34.4
+5ADC on Bottom Layer "NONET_L-01_P-001" (solid, pour order 65): 54,73.4 76.8,73.4 76.8,68.8 54,68.8
NetC15_1 on Bottom Layer "NONET_L-01_P-001" (solid, pour order 37): 16,20.75 11.5,20.75 11.5,19.25 14.75,19.25 14.75,16 16,16
+5C on Bottom Layer "NONET_L-01_P-001" (solid, pour order 61): 5.25,59.2 9,59.2 9,56.45 5.25,56.45
GNDA on Bottom Layer "NONET_L-01_P-001" (solid, shelved, pour order 51): 5,5 5,6.5 5,152.5 155,152.5 155,5

## Keep-outs
Keep-Out Layer:
  the board outline again, w0.1

## Silkscreen, mask and mechanical layers (free items; w line width, h text height)
Top Overlay:
  text "100%" at 15.025,59.475 h1.5 r270
  text "25%" at 8.75,59.2 h1.5 r270
  text "50%" at 10.5,59.2 h1.5 r270
  text "75%" at 12.5,59.2 h1.5 r270

## Text inside footprints (layer, text, board x,y; h text height)
B1: Top Overlay "L" at 25.939,78.899 h1.52; Top Overlay "R" at 30.939,78.899 h1.52
DA8: Mechanical 8 "Термопад!" at 19.675,49.925 h0.5 r270